# Altium PCB h743PCB.PcbDoc (part 1 of 3)
Units mil, origin at the board's own origin, x right, y up, seen from the top; angles counter-clockwise.
Board outline 2560 x 1770 mil, 4 copper layers (Top Layer, Signal, some, Bottom Layer), stack 63.712 mil thick; 101 components, 163 nets, 684 pads, 394 vias.
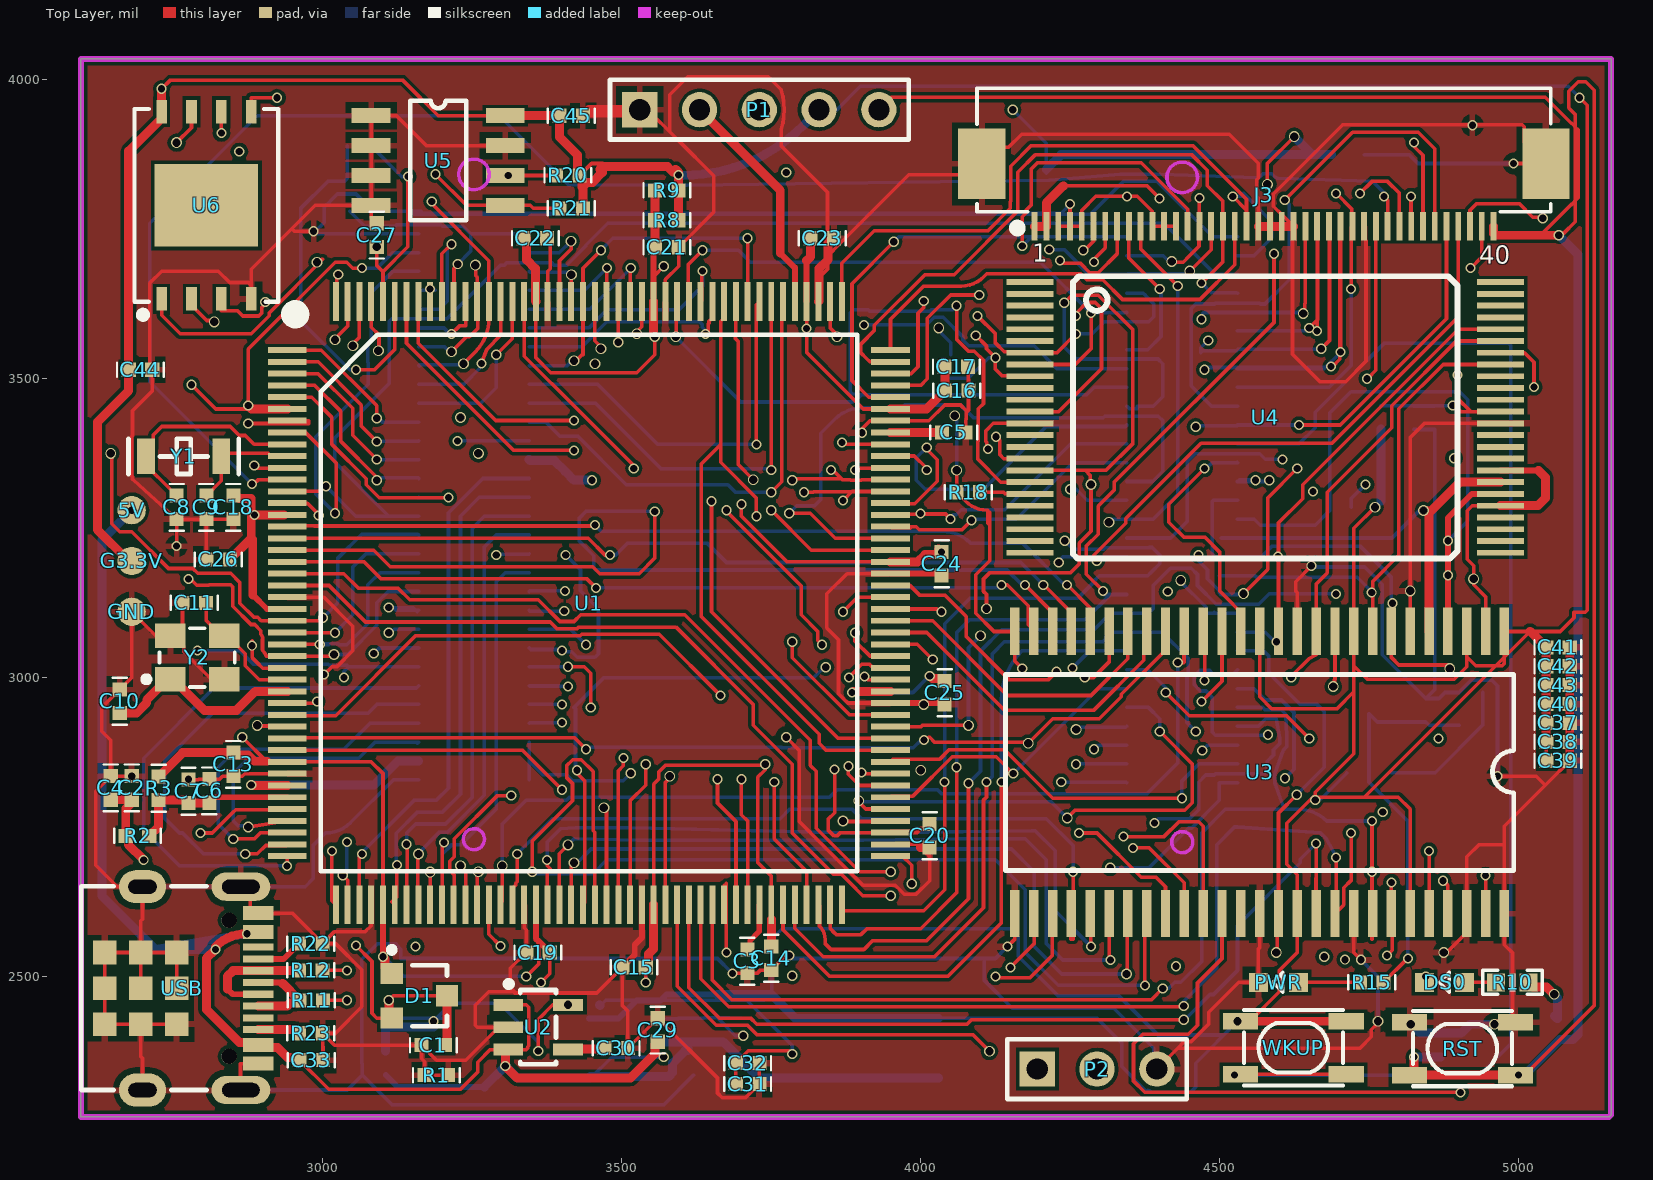
[diagram p0: Top Layer view]
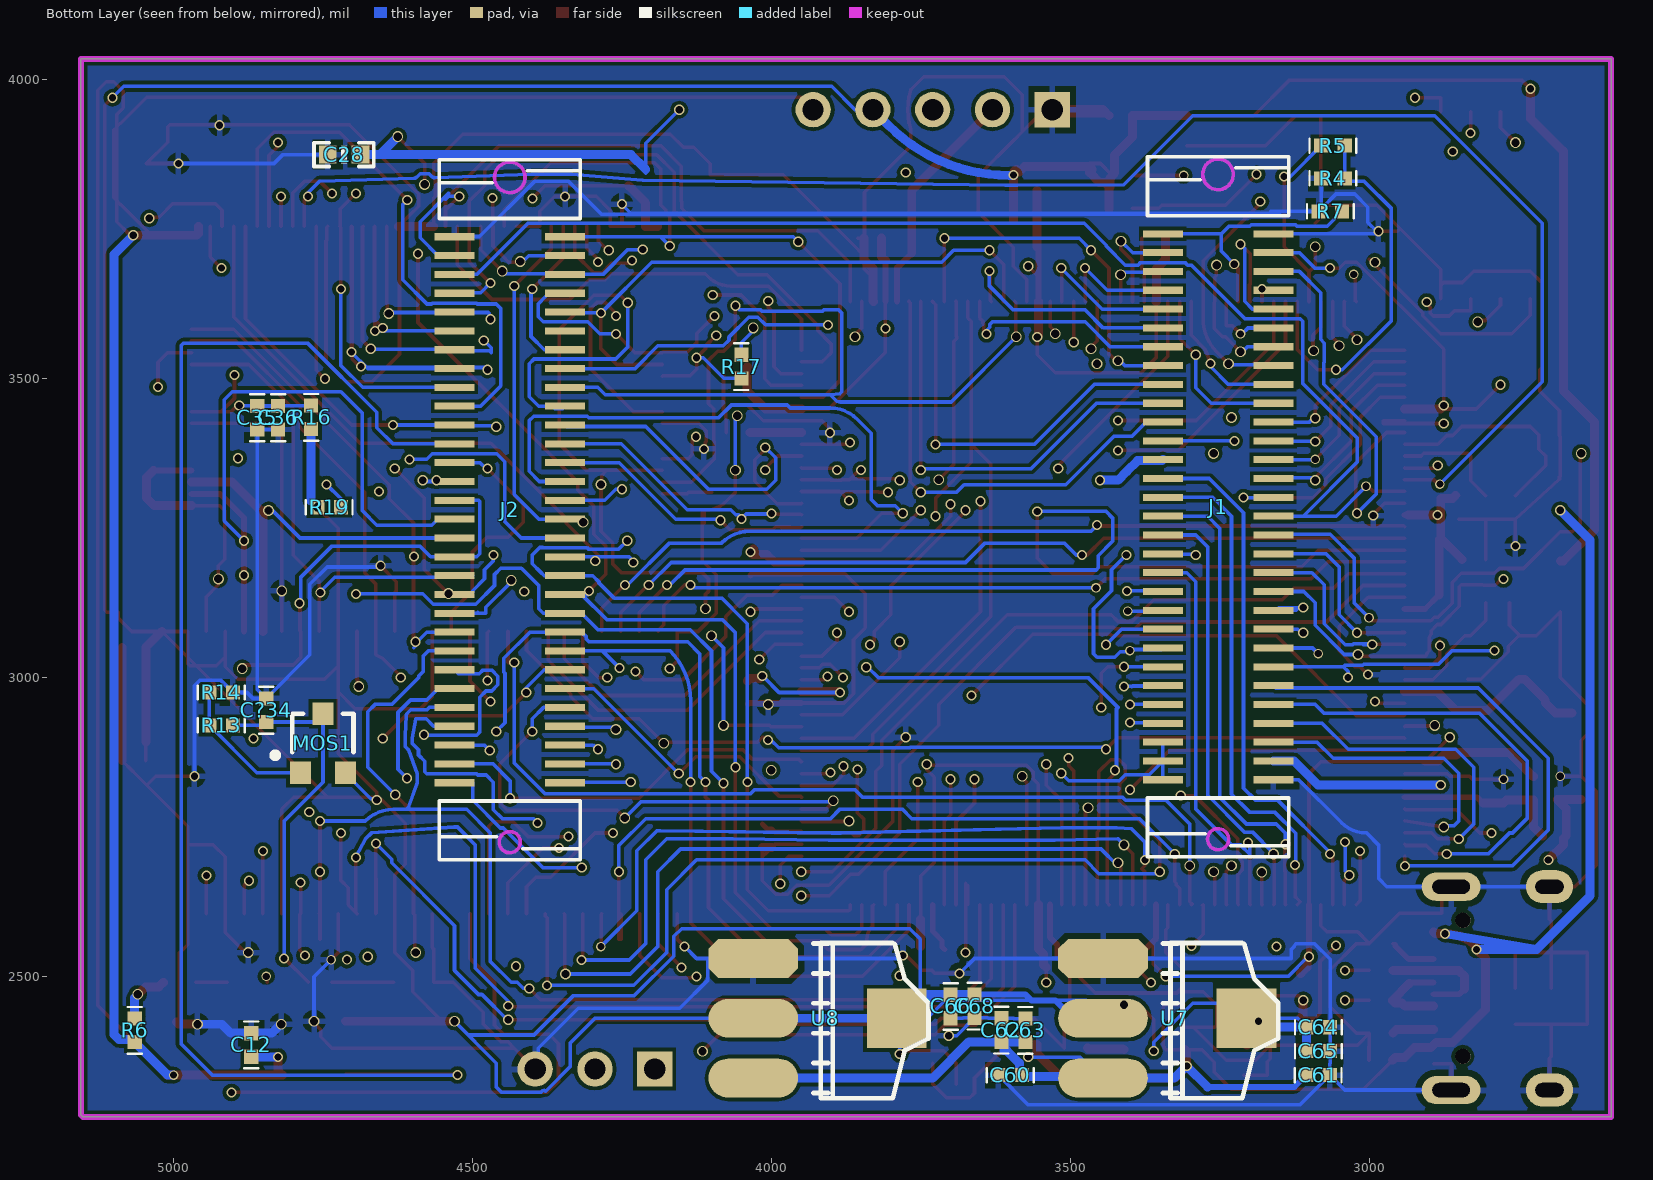
[diagram p1: Bottom Layer view, seen from below]
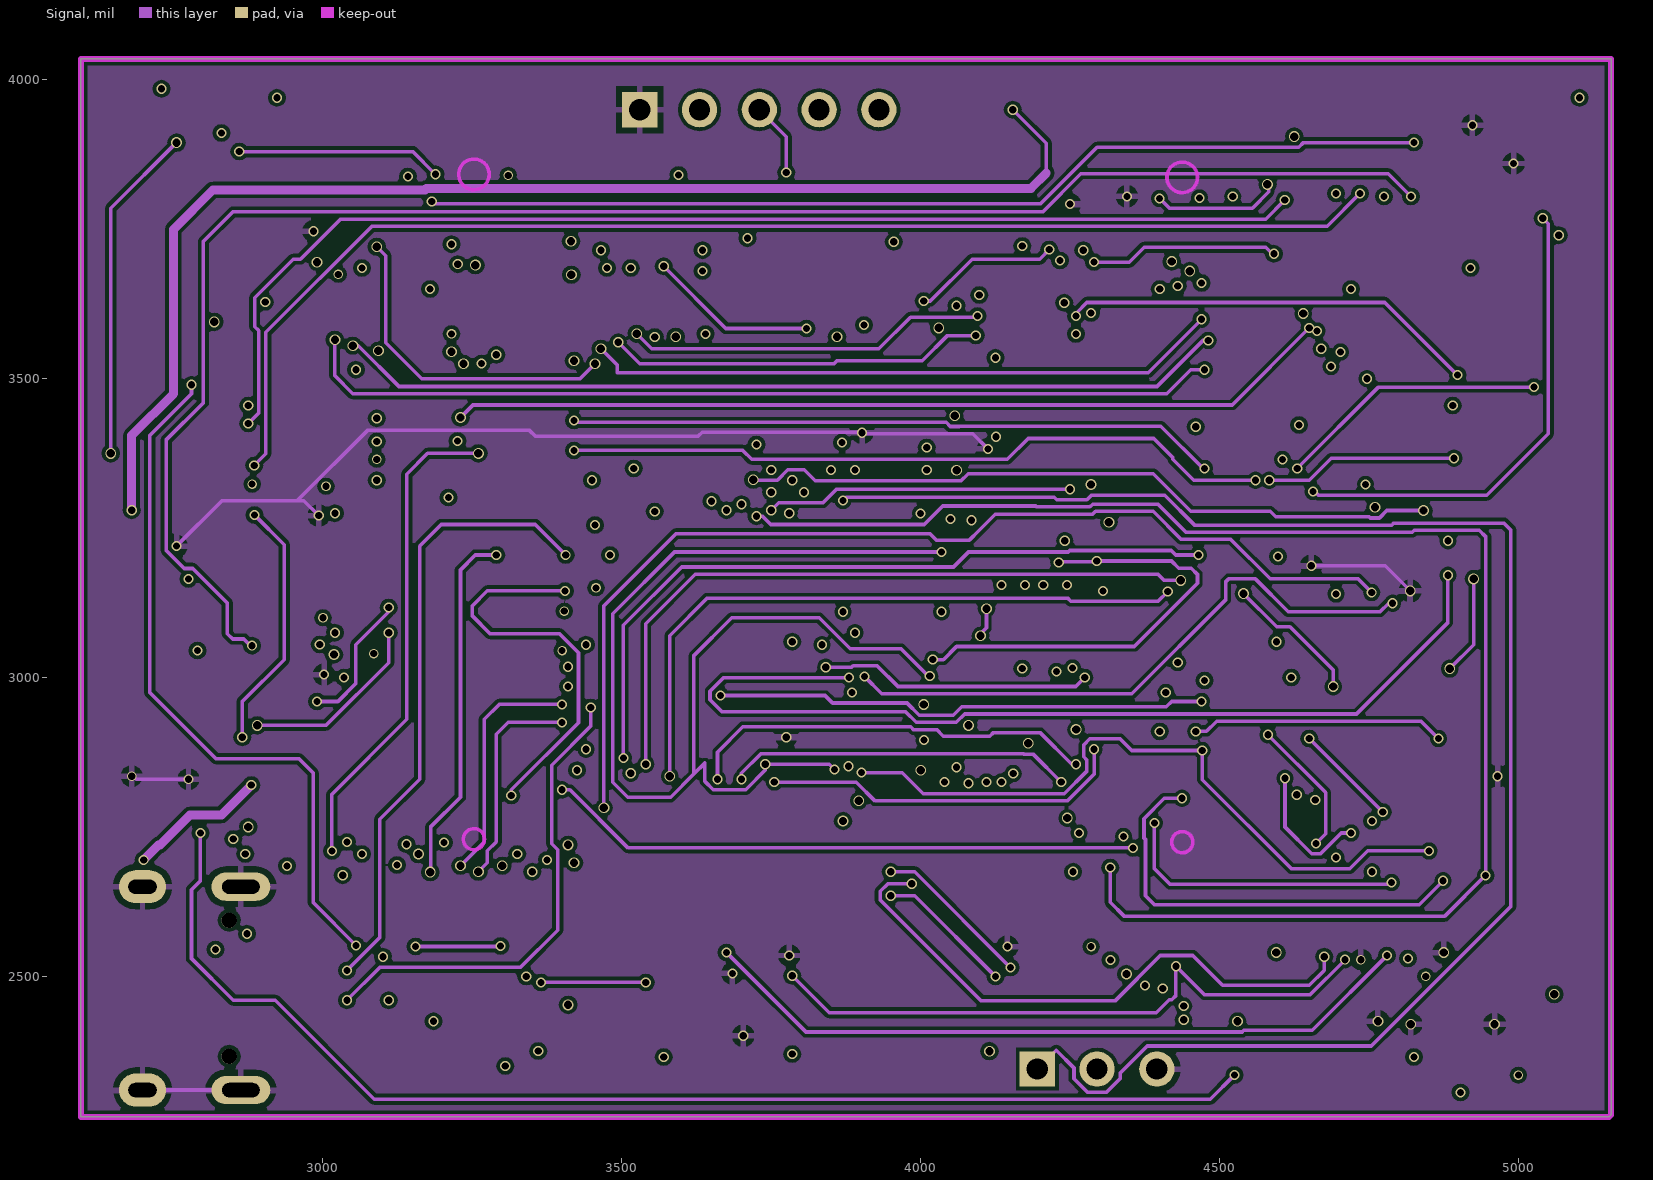
[diagram p2: Signal]
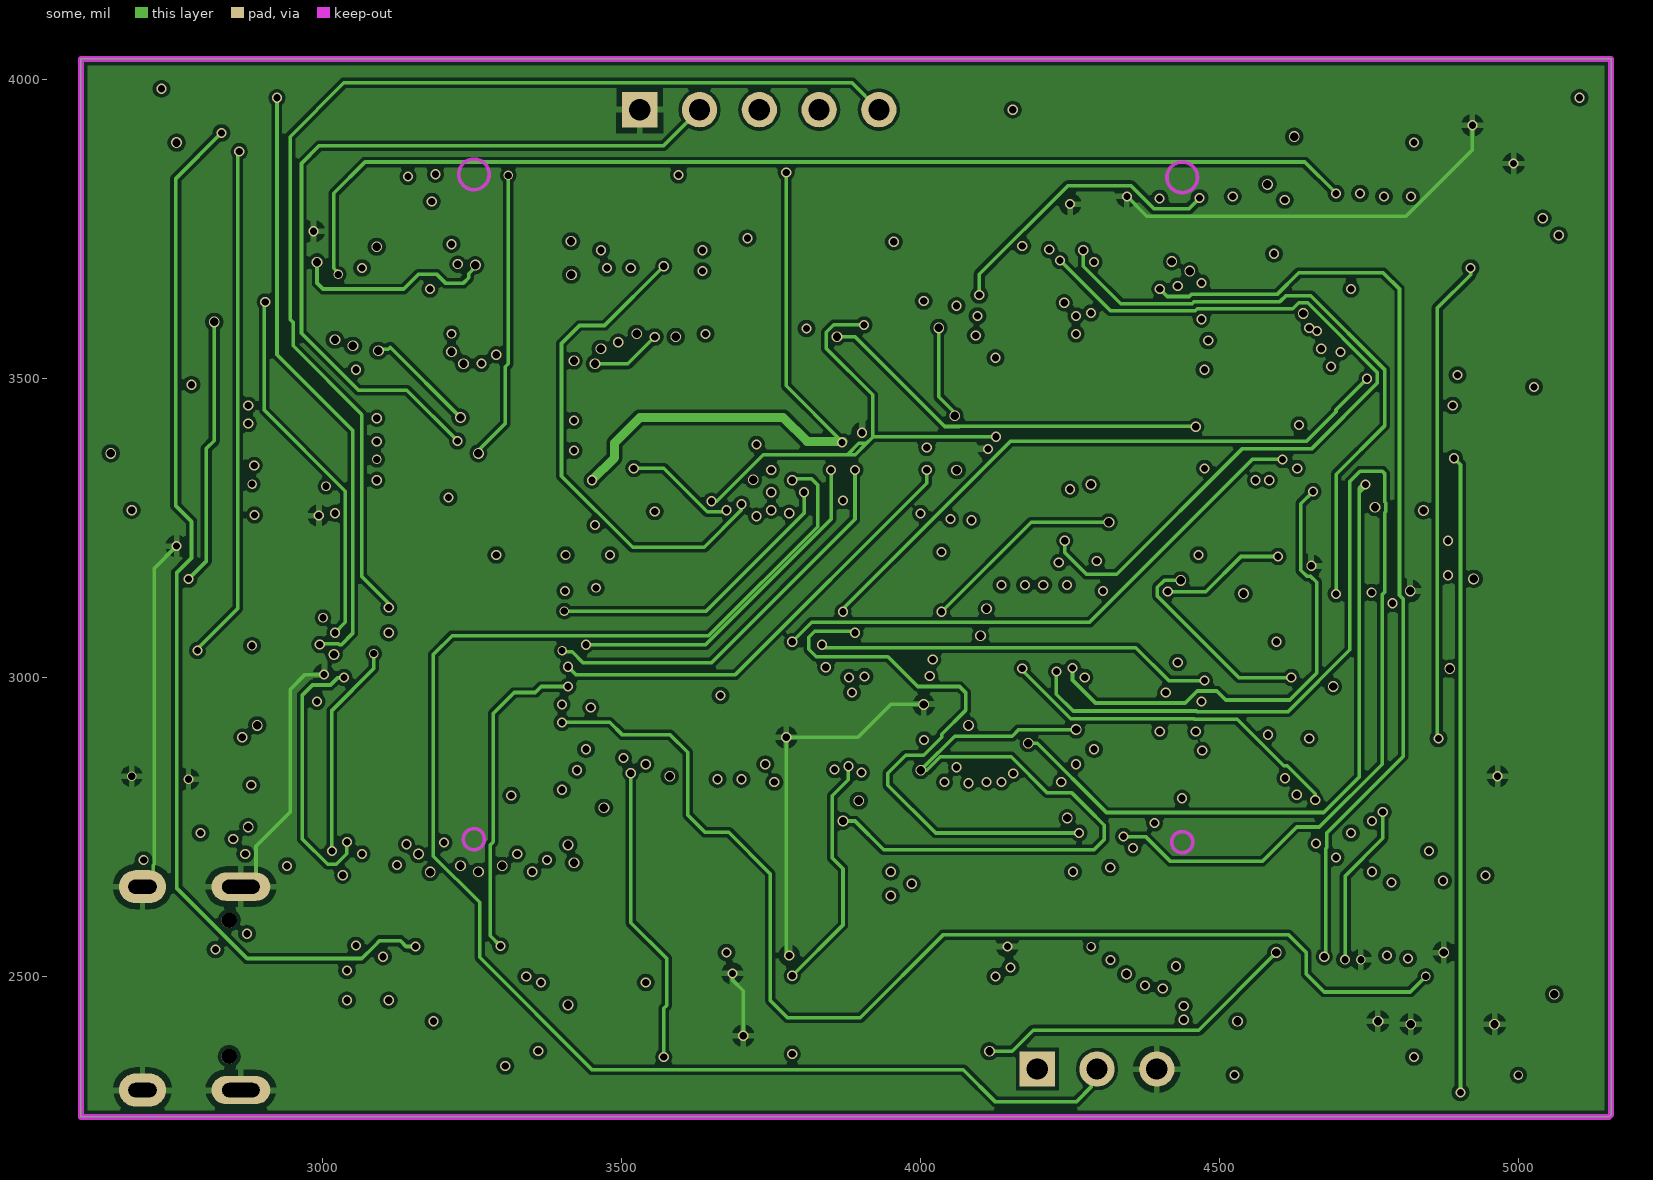
[diagram p3: some]

## Layer stack, top to bottom
Top Solder: solder mask 0.4, Solder Resist, Dk 3.5
Top Layer: signal copper 1.378
Dielectric 3: prepreg 2.8, PP-006, Dk 4.1
Signal: signal copper 1.378
Dielectric 1: core 49.8, Core-016, Dk 4.3
Dielectric 6: prepreg 2.8, PP-006, Dk 4.1
some: signal copper 1.378
Dielectric 2: prepreg 2.8, PP-006, Dk 4.1
Bottom Layer: signal copper 1.378
Bottom Solder: solder mask 0.4, Solder Resist, Dk 3.5

## Board outline
2595,2265 2595,4035 5155,4035 5155,2268.55 5151.45,2265

## Design rules (kind name [scope] priority, off if disabled: settings)
Clearance [All] p1: gap=6 ignorepadtopadclearanceinfootprint=FALSE except(0: Arc-Hole Track-Hole SMDPad-Hole THPad-Hole Via-Hole Fill-Hole Poly-Hole Region-Hole Text-Hole)
ComponentClearance [All] p1: gap=0 collisioncheckmode=3 verticalgap=0 showdistances=FALSE
DiffPairsRouting [All] p1: maxlimit=18 minlimit=10 mostfreqgap=10 toplayer_minwidth=6 toplayer_maxwidth=15 toplayer_prefwidth=6.5 midlayer1_maxgap=10 midlayer1_minwidth=15 midlayer1_maxwidth=15 midlayer1_prefwidth=15 midlayer2_maxgap=10 midlayer2_minwidth=15 midlayer2_maxwidth=15 midlayer2_prefwidth=15 bottomlayer_minwidth=6 bottomlayer_maxwidth=15 bottomlayer_prefwidth=6.5 maxuncoupledlength=500
HoleToHoleClearance [All] p1: gap=1 allowstackedmicrovias=TRUE
MinimumSolderMaskSliver [All] p1: minsoldermaskwidth=0
PlaneClearance [All] p1: clearance=6
PolygonConnect [All] p1: connectstyle=Relief reliefconductorwidth=10 reliefentries=4 polygonreliefangle="90 Angle" airgapwidth=10
RoutingVias [All] p1: holewidth=12 width=17 viastyle="Through Hole" minholewidth=12 minwidth=17 maxholewidth=14 maxwidth=18
SilkToSilkClearance [All] p1: silktosilkclearance=0
SilkToSolderMaskClearance [IsPad] p1: minsilkscreentomaskgap=0 clearancetoexposedcopper=TRUE
SolderMaskExpansion [All] p1: expansion=4 istentingtop=FALSE
Width [All] p1: maxlimit=20 minlimit=6 preferedwidth=6
23 further rules are at their usual default settings.

## Classes and differential pairs
net class "New Class": RESET VBAT VCAP1 VCAP2 VCC VCC3.3 VCC3.3M VCC5 VCC_LED VDDA VREF+
component class stm32h743: C1 C2 C3 C4 C5 C6 C7 C8 C9 C10 C11 C12 C13 C14 C15 C16 C17 C18 C19 C20 C21 C22 C23 C24 C25 C26 C27 D1 P1 R1 R2 R3 R4 R5 R6 R7 R8 R9 RST Y1 Y2
component class some: 5V C28 C29 C30 C31 C32 C33 C?34 DS0 G3.3V GND J3 MOS1 P2 PWR R10 R11 R12 R13 R14 R15 R22 R23 U2 USB WKUP
component class room: C35 C36 C37 C38 C39 C40 C41 C42 C43 C44 C45 R16 R17 R18 R19 R20 R21 U3 U5 U6
component class connect: J1 J2

## Components (designator, comment, footprint, x,y, rotation, side; value= is the part's Value field where it differs from the comment)
5V "TEST-POINT" TP-1.5 2680,3280 r90 top
C1 "0.1uF" 0402 3165,2385 r0 top
C2 "0.1uF" 0402 2680,2835 r270 top
C3 "22uF" 0402 3710,2505.63 r90 top
C4 "22uF" 0402 2645,2835 r270 top
C5 "22uF" 0402 4035.63,3410 r0 top
C6 "10uF" 0402 2810,2790.63 r90 top
C7 "0.1uF" 0402 2775,2790 r90 top
C8 "6pF" 0402 2755,3265 r90 top
C9 "6pF" 0402 2805,3265 r90 top
C10 "22pF" 0402 2660,2980 r270 top
C11 "22pF" 0402 2765,3125 r0 top
C12 "0.1uF" 0402 4870,2365.63 r90 bottom
C13 "0.1uF" 0402 2850,2874.37 r270 top
C14 "0.1uF" 0402 3750,2550 r270 top
C15 "0.1uF" 0402 3540,2515 r180 top
C16 "0.1uF" 0402 4040.63,3480 r0 top
C17 "0.1uF" 0402 4040,3520 r0 top
C18 "0.1uF" 0402 2850,3304.37 r270 top
C19 "0.1uF" 0402 3379.37,2540 r180 top
C20 "0.1uF" 0402 4015,2755 r270 top
C21 "0.1uF" 0402 3555.63,3720 r0 top
C22 "0.1uF" 0402 3335.63,3735 r0 top
C23 "0.1uF" 0402 3815.63,3735 r0 top
C24 "0.1uF" 0402 4035,3210 r270 top
C25 "0.1uF" 0402 4040,2994.37 r270 top
C26 "0.1uF" 0402 2844.32,3197.52 r180 top
C27 "0.1uF" 0402 3090,3720.63 r90 top
C28 "0.1uF" 0603P 4715,3875 r180 bottom
C29 "10uF" 0402 3560,2430 r270 top
C30 "10pF" 0402 3510,2380 r180 top
C31 "6pF" 0402 3730,2320 r180 top
C32 "10uF" 0402 3730,2355 r180 top
C33 "0.1uF" 0402 3000,2360 r180 top
C35 "0.1uF" 0402 4860,3415 r90 bottom
C36 "0.1uF" 0402 4825,3415 r90 bottom
C37 "0.1uF" 0402 5085.83,2924.05 r180 top
C38 "0.1uF" 0402 5085.83,2892.43 r180 top
C39 "0.1uF" 0402 5085.83,2860.81 r180 top
C40 "0.1uF" 0402 5085.83,2955.68 r180 top
C41 "0.1uF" 0402 5085.83,3050.54 r180 top
C42 "0.1uF" 0402 5085.83,3018.92 r180 top
C43 "0.1uF" 0402 5085.83,2987.3 r180 top
C44 "0.1uF" 0402 2675,3515 r0 top
C45 "0.1uF" 0402 3395.63,3940 r0 top
C60 "0.1uF" 0402 3580.63,2335 r0 bottom
C61 "10uF" 0402 3105,2335 r180 bottom
C62 "0.1uF" 0402 3615,2390.63 r90 bottom
C63 "10uF" 0402 3575,2390 r90 bottom
C64 "0.1uF" 0402 3104.37,2415 r180 bottom
C65 "10uF" 0402 3104.37,2375 r180 bottom
C66 "01uF" 0402 3700,2469.37 r270 bottom
C68 "10uF" 0402 3660,2470 r270 bottom
C?34 "0.1uF" 0402 4845,2925.63 r90 bottom
D1 "BAT54C" SOT-23 3156.26,2467.6 r270 top
DS0 "LED" SMDLED-0603 4910,2490 r180 top
G3.3V "TEST-POINT" TP-1.5 2680,3195 r180 top
GND "TEST-POINT" TP-1.5 2680,3110 r180 top
J1 "3710M060046G3FT01" 3710F060046G3FT01 3345.04,2829.02 r0 bottom
J2 "3710M060046G3FT01" 3710F060046G3FT01 4530.04,2824.06 r0 bottom
J3 "FPC-40" FPC-TOP40 4190.67,3751 r0 top
MOS1 "SI2301" SO-G3/C2.5 4750,2890 r180 bottom
P1 "SWD" HDR1X5 3530,3950 r0 top
P2 "USART1" HDR1X3 4195,2345 r0 top
PWR "LED" SMDLED-0603 4631.93,2490 r180 top
R1 "10K" 0402 3170,2335 r0 top
R2 "10R" 0402 2709.37,2735 r180 top
R3 "10R" 0402 2725,2834.37 r270 top
R4 "0R" 0402 3040.63,3835 r0 bottom
R5 "0R" 0402 3080,3890 r180 bottom
R6 "10K" 0402 5065,2390 r90 bottom
R7 "100K" 0402 3045,3780 r0 bottom
R8 "0R" 0402 3595,3765 r180 top
R9 "0R" 0402 3595,3815 r180 top
R10 "1K" 0603P 4990,2490 r180 top
R11 "22R" 0402 3000,2460 r180 top
R12 "22R" 0402 2999.37,2510 r180 top
R13 "1K" 0402 4900.63,2920 r0 bottom
R14 "100K" 0402 4900.63,2975 r0 bottom
R15 "1K" 0402 4735,2490 r0 top
R16 "0R" 0402 4770,3455 r270 bottom
R17 "10K" 0402 4050,3540 r270 bottom
R18 "10K" 0402 4099.37,3310 r180 top
R19 "10K" 0402 4759.37,3285 r180 bottom
R20 "4.7K" 0402 3390,3840 r0 top
R21 "4.7K" 0402 3395.63,3785 r0 top
R22 "4.7K" 0402 2999.37,2555 r180 top
R23 "4.7K" 0402 2999.37,2405 r180 top
RST "KEY_M" KEY_SOP324225 4989.09,2442.28 r180 top
U1 "STM32H743IIT6" LQFP176 2940.3,3547.78 r0 top
U2 "CAT6219-330TD" SOT-23-5 3310,2452.4 r0 top
U3 "IS42S16160B" TSOP54 4976.5,3077.44 r270 top
U4 "K9F2G08U0C" TSOP48 4182.6,3661.53 r0 top
U5 "24C256" SOP-8 3080.59,3940 r0 top
U6 "W25Q128" WSON8 2805,3790 r90 top
U7 "AMS1117-3.3" AMS1117 3444.94,2530.03 r270 bottom
U8 "AMS1117-3.3" AMS1117 4029.94,2530.03 r270 bottom
USB "USB OTG" "USB Type-C" 2795,2480 r270 top
WKUP "KEY_UP" KEY_SOP324225 4706.26,2443.7 r180 top
Y1 "32.768KHz" XTAL3215 2704.02,3370 r0 top
Y2 "25Mhz" XTAL3225 2744.45,2997.17 r0 top

## Footprints (in the part's own frame and the unit in brackets; to place one, negate y for a bottom-side part, rotate by r counter-clockwise, add the part's x,y. Pads: shape width x height; smd on the part's side, far side on the other; paste and mask are expansions set on the pad)
0402 [mm]
  rect 0.6x0.6 smd: 1(0,0) 2(1,0)
  silkscreen extent -0.5,-0.3 1.5,0.3
0603P [mil]
  rect 30x30 smd: 1(-27,0) 2(27.5,-0.06)
  silkscreen extent -50,-20 50,20
3710F060046G3FT01 [mm]
  rect 1.7x0.3 smd: 1(-4.7,0) 2(-4.7,-0.8) 3(-4.7,-1.6) 4(-4.7,-2.4) 5(-4.7,-3.2) 6(-4.7,-4) 7(-4.7,-4.8) 8(-4.7,-5.6) 9(-4.7,-6.4) 10(-4.7,-7.2) 11(-4.7,-8) 12(-4.7,-8.8) 13(-4.7,-9.6) 14(-4.7,-10.4) 15(-4.7,-11.2) 16(-4.7,-12) 17(-4.7,-12.8) 18(-4.7,-13.6) 19(-4.7,-14.4) 20(-4.7,-15.2) 21(-4.7,-16) 22(-4.7,-16.8) 23(-4.7,-17.6) 24(-4.7,-18.4) 25(-4.7,-19.2) 26(-4.7,-20) 27(-4.7,-20.8) 28(-4.7,-21.6) 29(-4.7,-22.4) 30(-4.7,-23.2) 31(0,-23.2) 32(0,-22.4) 33(0,-21.6) 34(0,-20.8) 35(0,-20) 36(0,-19.2) 37(0,-18.4) 38(0,-17.6) 39(0,-16.8) 40(0,-16) 41(0,-15.2) 42(0,-14.4) 43(0,-13.6) 44(0,-12.8) 45(0,-12) 46(0,-11.2) 47(0,-10.4) 48(0,-9.6) 49(0,-8.8) 50(0,-8) 51(0,-7.2) 52(0,-6.4) 53(0,-5.6) 54(0,-4.8) 55(0,-4) 56(0,-3.2) 57(0,-2.4) 58(0,-1.6) 59(0,-0.8) 60(0,0)
  Keep-Out Layer circle w0.152: c-2.35,2.525 r0.45
  Keep-Out Layer circle w0.152: c-2.35,-25.725 r0.65
  silkscreen extent -5.35,-26.47 0.65,3.28
AMS1117 [mil]
  oct 65x150 smd: 1(0.03,-0.06)
  oval 65x150 smd: 2(100.03,-0.06) 3(200.03,-0.06)
  rect 100x100 smd: 4(100.03,239.94)
  silkscreen extent -26,100 234,293
FPC-TOP40 [mm]
  rect 0.25x1.2 smd: 1(0,0.102) 2(0.5,0.102) 3(1,0.102) 4(1.5,0.102) 5(2,0.102) 6(2.5,0.102) 7(3,0.102) 8(3.5,0.102) 9(4,0.102) 10(4.5,0.102) 11(5,0.102) 12(5.5,0.102) 13(6,0.102) 14(6.5,0.102) 15(7,0.102) 16(7.5,0.102) 17(8,0.102) 18(8.5,0.102) 19(9,0.102) 20(9.5,0.102) 21(10,0.102) 22(10.5,0.102) 23(11,0.102) 24(11.5,0.102) 25(12,0.102) 26(12.5,0.102) 27(13,0.102) 28(13.5,0.102) 29(14,0.102) 30(14.5,0.102) 31(15,0.102) 32(15.5,0.102) 33(16,0.102) 34(16.5,0.102) 35(17,0.102) 36(17.5,0.102) 37(18,0.102) 38(18.5,0.102) 39(19,0.102) 40(19.5,0.102)
  rect 2x3 smd: A(-2.25,2.754) B(21.725,2.754)
  silkscreen extent -2.45,-0.15 21.92,5.97
HDR1X3 [mm]
  rect 1.5x1.5 hole 0.9: 1(0,0)
  round 1.5 hole 0.9: 2(2.54,0) 3(5.08,0)
  silkscreen extent -1.27,-1.27 6.35,1.27
HDR1X5 [mm]
  rect 1.5x1.5 hole 0.9: 1(0,0)
  round 1.5 hole 0.9: 2(2.54,0) 3(5.08,0) 4(7.62,0) 5(10.16,0)
  silkscreen extent -1.27,-1.27 11.43,1.27
KEY_SOP324225 [mm]
  rect 1.5x0.7 smd: 1(-0.15,2.725) 1(4.35,2.725) 2(-0.15,0.475) 2(4.35,0.475)
  silkscreen extent 0,0 4.2,3.2
LQFP176 [mm]
  rect 1.65x0.254 smd: 1(0,0) 2(0,-0.5) 3(0,-1) 4(0,-1.5) 5(0,-2) 6(0,-2.5) 7(0,-3) 8(0,-3.5) 9(0,-4) 10(0,-4.5) 11(0,-5) 12(0,-5.5) 13(0,-6) 14(0,-6.5) 15(0,-7) 16(0,-7.5) 17(0,-8) 18(0,-8.5) 19(0,-9) 20(0,-9.5) 21(0,-10) 22(0,-10.5) 23(0,-11) 24(0,-11.5) 25(0,-12) 26(0,-12.5) 27(0,-13) 28(0,-13.5) 29(0,-14) 30(0,-14.5) 31(0,-15) 32(0,-15.5) 33(0,-16) 34(0,-16.5) 35(0,-17) 36(0,-17.5) 37(0,-18) 38(0,-18.5) 39(0,-19) 40(0,-19.5) 41(0,-20) 42(0,-20.5) 43(0,-21) 44(0,-21.5) 89(25.631,-21.5) 90(25.631,-21) 91(25.631,-20.5) 92(25.631,-20) 93(25.631,-19.5) 94(25.631,-19) 95(25.631,-18.5) 96(25.631,-18) 97(25.631,-17.5) 98(25.631,-17) 99(25.631,-16.5) 100(25.631,-16) 101(25.631,-15.5) 102(25.631,-15) 103(25.631,-14.5) 104(25.631,-14) 105(25.631,-13.5) 106(25.631,-13) 107(25.631,-12.5) 108(25.631,-12) 109(25.631,-11.5) 110(25.631,-11) 111(25.631,-10.5) 112(25.631,-10) 113(25.631,-9.5) 114(25.631,-9) 115(25.631,-8.5) 116(25.631,-8) 117(25.631,-7.5) 118(25.631,-7) 119(25.631,-6.5) 120(25.631,-6) 121(25.631,-5.5) 122(25.631,-5) 123(25.631,-4.5) 124(25.631,-4) 125(25.631,-3.5) 126(25.631,-3) 127(25.631,-2.5) 128(25.631,-2) 129(25.631,-1.5) 130(25.631,-1) 131(25.631,-0.5) 132(25.631,0)
  rect 0.254x1.65 smd: 45(2.065,-23.566) 46(2.566,-23.566) 47(3.066,-23.566) 48(3.565,-23.566) 49(4.066,-23.566) 50(4.565,-23.566) 51(5.066,-23.566) 52(5.565,-23.566) 53(6.066,-23.566) 54(6.565,-23.566) 55(7.066,-23.566) 56(7.565,-23.566) 57(8.066,-23.566) 58(8.565,-23.566) 59(9.066,-23.566) 60(9.565,-23.566) 61(10.066,-23.566) 62(10.565,-23.566) 63(11.066,-23.566) 64(11.565,-23.566) 65(12.066,-23.566) 66(12.565,-23.566) 67(13.066,-23.566) 68(13.565,-23.566) 69(14.066,-23.566) 70(14.565,-23.566) 71(15.066,-23.566) 72(15.566,-23.566) 73(16.066,-23.566) 74(16.566,-23.566) 75(17.065,-23.566) 76(17.566,-23.566) 77(18.065,-23.566) 78(18.566,-23.566) 79(19.065,-23.566) 80(19.566,-23.566) 81(20.065,-23.566) 82(20.566,-23.566) 83(21.065,-23.566) 84(21.566,-23.566) 85(22.065,-23.566) 86(22.566,-23.566) 87(23.065,-23.566) 88(23.566,-23.566) 133(23.566,2.065) 134(23.065,2.065) 135(22.566,2.065) 136(22.065,2.065) 137(21.566,2.065) 138(21.065,2.065) 139(20.566,2.065) 140(20.065,2.065) 141(19.566,2.065) 142(19.065,2.065) 143(18.566,2.065) 144(18.065,2.065) 145(17.566,2.065) 146(17.065,2.065) 147(16.566,2.065) 148(16.066,2.065) 149(15.566,2.065) 150(15.066,2.065) 151(14.565,2.065) 152(14.066,2.065) 153(13.565,2.065) 154(13.066,2.065) 155(12.565,2.065) 156(12.066,2.065) 157(11.565,2.065) 158(11.066,2.065) 159(10.565,2.065) 160(10.066,2.065) 161(9.565,2.065) 162(9.066,2.065) 163(8.565,2.065) 164(8.066,2.065) 165(7.565,2.065) 166(7.066,2.065) 167(6.565,2.065) 168(6.066,2.065) 169(5.565,2.065) 170(5.066,2.065) 171(4.565,2.065) 172(4.066,2.065) 173(3.565,2.065) 174(3.066,2.065) 175(2.566,2.065) 176(2.065,2.065)
  silkscreen extent 0.04,-22.15 24.22,1.82
SMDLED-0603 [mil]
  rect 32x32 smd: 1(0,0) 2(66.93,0)
  silkscreen extent 26,-17 42,17
SO-G3/C2.5 [mm]
  rect 0.9x0.95 smd: 1(-0.95,-1.25) 2(0.95,-1.25) 3(0,1.25)
  silkscreen extent -2.16,-0.63 1.3,1.25
SOP-8 [mil]
  rect 65x25 smd: 1(0,0) 2(0,-50) 3(0,-100) 4(0,-150) 5(224.41,-150) 6(224.41,-100) 7(224.41,-50) 8(224.41,0)
  silkscreen extent 65,-175 159,25
SOT-23 [mm]
  rect 0.9x0.95 smd: 1(-0.95,-1.048) 2(0.95,-1.048) 3(0,1.302)
  silkscreen extent -2.07,-1.17 1.3,1.3
SOT-23-5 [mil]
  rect 50x20 smd: 1(0,0) 2(0,-37.4) 3(0,-74.8) 4(100,-74.8) 5(100,0)
  silkscreen extent 0,-99 80,35
TP-1.5 [mm]
  round 1.2 smd: 1(0,0)
TSOP48 [mm]
  rect 2x0.25 smd: 1(0,0) 2(0,-0.5) 3(0,-1) 4(0,-1.5) 5(0,-2) 6(0,-2.5) 7(0,-3) 8(0,-3.5) 9(0,-4) 10(0,-4.5) 11(0,-5) 12(0,-5.5) 13(0,-6) 14(0,-6.5) 15(0,-7) 16(0,-7.5) 17(0,-8) 18(0,-8.5) 19(0,-9) 20(0,-9.5) 21(0,-10) 22(0,-10.5) 23(0,-11) 24(0,-11.5) 25(20,-11.5) 26(20,-11) 27(20,-10.5) 28(20,-10) 29(20,-9.5) 30(20,-9) 31(20,-8.5) 32(20,-8) 33(20,-7.5) 34(20,-7) 35(20,-6.5) 36(20,-6) 37(20,-5.5) 38(20,-5) 39(20,-4.5) 40(20,-4) 41(20,-3.5) 42(20,-3) 43(20,-2.5) 44(20,-2) 45(20,-1.5) 46(20,-1) 47(20,-0.5) 48(20,0)
  silkscreen extent 1.83,-11.75 18.17,0.25
TSOP54 [mm]
  rect 2x0.4 smd: 1(0,0) 2(0,-0.8) 3(0,-1.6) 4(0,-2.4) 5(0,-3.2) 6(0,-4) 7(0,-4.8) 8(0,-5.6) 9(0,-6.4) 10(0,-7.2) 11(0,-8) 12(0,-8.8) 13(0,-9.6) 14(0,-10.4) 15(0,-11.2) 16(0,-12) 17(0,-12.8) 18(0,-13.6) 19(0,-14.4) 20(0,-15.2) 21(0,-16) 22(0,-16.8) 23(0,-17.6) 24(0,-18.4) 25(0,-19.2) 26(0,-20) 27(0,-20.8) 28(12,-20.8) 29(12,-20) 30(12,-19.2) 31(12,-18.4) 32(12,-17.6) 33(12,-16.8) 34(12,-16) 35(12,-15.2) 36(12,-14.4) 37(12,-13.6) 38(12,-12.8) 39(12,-12) 40(12,-11.2) 41(12,-10.4) 42(12,-9.6) 43(12,-8.8) 44(12,-8) 45(12,-7.2) 46(12,-6.4) 47(12,-5.6) 48(12,-4.8) 49(12,-4) 50(12,-3.2) 51(12,-2.4) 52(12,-1.6) 53(12,-0.8) 54(12,0)
  silkscreen extent 1.83,-21.2 10.16,0.4
"USB Type-C" [mm]
  rect 0.6x1.3 smd mask+0.064: 1(-3.2,2.462) 2(-2.4,2.462) 11(2.4,2.462) 12(3.2,2.462)
  rect 0.3x1.3 smd mask+0.064: 3(-1.75,2.462) 4(-1.25,2.462) 5(-0.75,2.462) 6(-0.25,2.462) 7(0.25,2.462) 8(0.75,2.462) 9(1.25,2.462) 10(1.75,2.462)
  oval 1.2x2.5 hole 0.6 slot 1.6 at 90 deg: SH1(-4.32,1.717) SH3(4.32,1.717)
  oval 1.4x2 hole 0.6 slot 1.2 at 90 deg: SH2(-4.32,-2.462) SH4(4.32,-2.462)
  rect 1x1 smd mask+0: SH2(-1.524,-1.016) SH2(-1.524,-2.54) SH2(-1.524,-4.064) SH2(0,-1.016) SH2(0,-2.54) SH2(0,-4.064) SH2(1.524,-4.064)
  rect 1x1 smd paste+0 mask+0: SH2(1.524,-1.016) SH2(1.524,-2.54)
  round 0.65 hole 0.65 unplated mask+0: ""(-2.89,1.218) ""(2.89,1.218)
  silkscreen extent -4.34,-5.07 4.32,0.25, body extent -4.47,-5.04 4.47,2.86, height 3.2
WSON8 [mm]
  rect 1x0.45 smd: 1(-3.975,1.905) 2(-3.975,0.635) 3(-3.975,-0.635) 4(-3.975,-1.905) 5(3.975,-1.905) 6(3.975,-0.635) 7(3.975,0.635) 8(3.975,1.905)
  rect 3.5x4.4 smd: 9(0,0)
  silkscreen extent -4.8,-3.05 4.1,3.05
XTAL3215 [mm]
  rect 0.75x1.5 smd: 1(0,0) 2(3.2,0)
  silkscreen extent -0.74,-0.75 3.94,0.75
XTAL3225 [mm]
  rect 1.3x1.05 smd: 1(0,0) 2(2.3,0) 3(2.3,1.85) 4(0,1.85)
  silkscreen extent -1.14,-0.33 2.74,2.17

## Part data
5V G3.3V GND: "测试点"
C1 C2 C3 C4 C5 C6 C7 C10 C11 C12 C13 C14 C15 C16 C17 C18 C19 C20 C21 C22 C23 C24 C25 C26 C27 C28 C29 C30 C31 C32 C33 C35 C36 C37 C38 C39 C40 C41 C42 C43 C44 C45 C60 C61 C62 C63 C64 C65 C66 C68 C?34: library part C
C8 C9: library part C_7
D1: "双肖特基二极管"
J1 J2: library part 3710F, "3710F060046G3FT01"
J3: "FPC-40P-0.5mm"
MOS1: library part MOS-P, "IRLML6401/SI2301"
P1: library part "Header 5", "Header, 5-Pin", LatestRevisionDate=17-Jul-2002, LatestRevisionNote="Re-released for DXP Platform.", Publisher="Altium Limited"
P2: library part "Header 3", "Header, 3-Pin", LatestRevisionDate=17-Jul-2002, LatestRevisionNote="Re-released for DXP Platform.", Publisher="Altium Limited"
R1 R2 R3 R4 R5 R6 R7 R8 R9 R10 R11 R12 R13 R14 R15 R16 R17 R18 R19 R20 R21 R22 R23: library part R
U1: JLCPCB Part Class="Extended Part", Low-Voltage Detect=有, Manufacturer=ST(意法半导体), Operating Temperature Range=-40℃~+85℃, Operating Voltage Range=1.62V~3.6V, ADC (Bit)=16bit, Add into BOM=yes, CCP Capture/Compare=-, communication protocol=-, Convert to PCB=yes, CPU Core=ARM-M系列, CPU Maximum Speed=480MHz, DAC (Bit)=12bit, Datasheet=https://atta.szlcsc.com/upload/public/pdf/source/20180326/C129442_D4CD7A13251C79DE4F637D238512E0C6.pdf, Device=STM32H743IIT6, Direct Memory Access=有, GPIO Ports Number=140, Infrared Data Association=有, Internal Comparator=-, Internal Oscillator=有, LCD Module=有, LCSC Part Name=STM32H743IIT6, Manufacturer Part=STM32H743IIT6, Peripheral/Function=DMA；LCD/LED驱动；PWM, Program Memory Type=FLASH, Program Storage Size=2MB, PWM (Bit)=-, RAM Size=1MB, Real-Time Clock=-, Secure Digital Input and Output=有, Supplier=LCSC, Supplier Footprint=LQFP-176(24x24), Supplier Part=C89597, Symbol=STM32H743IIT6, Universal Serial Bus=有, Watchdog=有
U2: "3.3V 500mA LDO"
U3: "32MB SDRAM"
U4: "256MB NAND FLASH"
U5: "EEPROM"
U7 U8: library part AMS1117
USB: library part "USB Type-C", "12P TypeC 母座"
WKUP: library part KEY_M_1
Y1: library part XTAL, "普通晶振", LatestRevisionDate=17-Jul-2002, LatestRevisionNote="Re-released for DXP Platform.", Published=8-Jun-2000, Publisher="Altium Limited"
Y2: library part XTAL_3225, "3225贴片无源晶振"

## Via types
v1: diameter 17, hole 12, Top Layer to Bottom Layer, 305 vias
v2: diameter 18, hole 14, Top Layer to Bottom Layer, 72 vias
v3: diameter 17/16/16/16 (per signal layer), hole 12, Top Layer to Bottom Layer, 17 vias

## Nets (pads, with @x,y where several pads share a name; then routed paths per layer and width w, separated by ;. In a path a pad name is that pad's centre, name@x,y a point inside that pad or via, vN(x,y) a via of type N, cw(c..) or ccw(c..) an arc to the next point about the centre after c; other vN are vias at no path point)
BOOT0: J1.31 R7.1 U1.166 | length 442.6
  Top Layer w6: U1.166@3218.47,3629.09 3219.23,3629.86 3219.23,3684.23 3225.53,3690.53 v1(3225.53,3691.6)
  Bottom Layer w6: R7.1@3045,3780 3070,3755 3120.5,3755 3122.81,3757.31 3197.19,3757.31 3199.5,3755 3234.3,3755 3246.9,3742.4 ; v1(3225.53,3691.6) 3246.9,3712.97 3246.9,3742.4 ; J1.31@3345.04,3742.4 3246.9,3742.4
FMC_A0: U1.16 U3.23 | length 1438
  Top Layer w6: U1.16@2940.3,3252.5 2941.55,3253.75 2985.5,3253.75 2985.75,3253.5 3453.5,3253.5 v1(3455,3255) ; v1(4245,3155) 4283.58,3116.42 U3.23@4283.58,3077.44
  Bottom Layer w6: v1(3455,3255) 3465,3245 4035,3245 cw(c4035,3176.72) 4083.28,3225 4085.71,3225 4170.25,3225 4240.25,3155 v1(4245,3155)
FMC_A1: U1.17 U3.24 | length 1411.2
  Top Layer w6: U1.17@2940.3,3232.82 3443.94,3232.82 3471.75,3205 v1(3480,3205) ; v1(4205,3155.09) 4205.94,3155.09 4252.09,3108.94 U3.24@4252.09,3077.44
  Bottom Layer w6: v1(3480,3205) 3490,3205 3510,3225 3642.44,3225 3674.94,3192.5 4167.59,3192.5 v1(4205,3155.09)
FMC_A2: U1.18 U3.25 | length 1773.7
  Top Layer w6: U1.18@2940.3,3213.13 3085,3213.13 3112.63,3185.5 3451.25,3185.5 3462.86,3173.9 3528.9,3173.9 3555,3200 v1(3555,3278) ; v1(4174.73,3155) 4174.73,3154.79 4220.59,3108.94 U3.25@4220.59,3077.44
  Bottom Layer w6: v1(3555,3278) 3440,3278 3429,3267 3429,3228 3453.02,3203.98 3453.02,3183.73 3456.75,3180 4144.47,3180 4169.47,3155 v1(4174.73,3155)
FMC_A3: U1.19 U3.26 | length 1321.3
  Top Layer w6: U1.19@2940.3,3193.45 3069.23,3193.45 3097.68,3165 3398.07,3165 3441.75,3165 v3(3456.75,3150) ; v1(4135,3155) 4145,3155 4180,3120 4180,3088.35 4190,3078.35 U3.26@4189.09,3077.44
  Bottom Layer w6: v3(3456.75,3150) 4130,3150 v1(4135,3155)
FMC_A4: U1.20 U3.29 | length 1679.1
  Top Layer w6: U1.20@2940.3,3173.76 3035,3173.76 3059.38,3149.38 3125.62,3149.38 3145,3130 3360.25,3130 3396.51,3093.74 3420.05,3093.74 3431.31,3105 3605,3105 3815,2895 3815,2853 3825,2843 3825,2748.03 3898.03,2675 v1(3950,2675) ; v1(4150,2515) 4190,2555 4190,2604.09 U3.29@4189.09,2605
  Signal w6: v1(3950,2675) 3990,2675 v1(4150,2515)
FMC_A5: U1.21 U3.30 | length 1727.6
  Top Layer w6: U1.21@2940.3,3154.08 3010,3154.08 3071.08,3093 3380.28,3093 3391.54,3081.74 3425.02,3081.74 3427.78,3084.5 3590.5,3084.5 3720,2955 3720,2920 3785,2855 3785,2740 3854.09,2670.91 3867.37,2670.91 3876.8,2661.48 3878.47,2659.81 3882.07,2656.21 3903.28,2635 v1(3950,2635) ; v1(4125,2500) 4127.5,2497.5 4182.5,2497.5 4220,2535 4220,2604.41 U3.30@4220.59,2605
  Signal w6: v1(3950,2635) 3990,2635 v1(4125,2500)
FMC_A6: U1.60 U3.31 | length 1278
  Top Layer w6: U1.60@3316.89,2620 3316.89,2647.48 3318.89,2649.48 3319.06,2649.48 3322.58,2653 3322.58,2656.21 3325,2658.63 v1(3325,2705) ; U3.31@4252.09,2605 4251.04,2603.96 4251.04,2562.63 4255,2562.63 v1(4255,2675)
  Bottom Layer w6: v1(3325,2705) 3384,2764 3765.07,2764 3781.07,2780 3885,2780 3901,2764 4210.14,2764 4255,2719.14 v1(4255,2675)
FMC_A7: U1.63 U3.32 | length 1223.1
  Top Layer w6: v1(3375,2695) 3375,2685.37 3380,2680.37 3375.47,2675.84 3375.47,2620.47 U1.63@3375.95,2620 ; U3.32@4283.58,2605 4284.29,2604.29 4284.29,2550.71 v3(4285,2550)
  Bottom Layer w6: v1(3375,2695) 3375,2725 3397.23,2747.23 3422.02,2748.99 3515.1,2748.99 3884.02,2740 3898.93,2740 4186.03,2744 4191,2744 4225,2710 4225,2610 v3(4285,2550)
FMC_A8: U1.64 U3.33 | length 1262.7
  Top Layer w6: U1.64@3395.63,2620 3395.32,2620.32 3395.32,2705.32 v2(3410,2720) ; U3.33@4315.08,2605 4315.08,2529.92 v1(4317.54,2527.46)
  Bottom Layer w6: v2(3410,2720) 3420.6,2730.6 3526,2728 3903.9,2728 4064.27,2730.08 4174.92,2730.08 4210,2695 4210,2555 4237.54,2527.46 v1(4317.54,2527.46)
FMC_A9: U1.65 U3.34 | length 1267
  Top Layer w6: U1.65@3415.32,2620 3415.16,2620.16 3415.16,2679.84 3415.16,2681.91 3415.16,2685.16 v2(3420,2690) ; v2(4344.18,2504) 4345.39,2505.2 4345.39,2603.81 U3.34@4346.57,2605
  Bottom Layer w6: v2@3422,2687 3448.24,2713.24 4151.76,2713.24 4190,2675 4190,2550 4236,2504 v2(4344.18,2504)
FMC_A10: U1.66 U3.22 | length 1345.7
  Top Layer w6: v1(3425,2845) 3425,2840 3438,2827 3438,2623 U1.66@3435,2620 ; v1(4274.56,3000) 4289.12,3000 4315.08,3025.95 U3.22@4315.08,3077.44
  Signal w6: v1(3841,3017.37) 3841.13,3017.5 3884.3,3017.5 3886.8,3020 3927,3020 3962,2985 4259.56,2985 v1(4274.56,3000)
  Bottom Layer w6: v1(3425,2845) 3422.5,2847.5 3422.5,2947.5 3420,2950 3470,3000 3821,3000 3838.37,3017.37 v1(3841,3017.37)
FMC_A11: U1.67 U3.35 | length 1796.9
  Top Layer w6: v1(3350,2675) 3350,2726.63 3417.5,2794.13 3417.5,2822.75 3407.5,2832.75 3407.5,2852.25 3417.75,2862.5 3432.25,2862.5 3452,2842.75 3452,2744.16 3454.84,2741.32 3454.84,2620.16 U1.67@3454.69,2620 ; v1(4375.37,2484.63) 4375,2485 4375,2598.07 4378.07,2601.14 U3.35@4378.07,2605
  Bottom Layer w6: v1(3350,2675) 3353,2672 3452,2672 3475,2695 4125,2695 4175,2645 4175,2540 4230,2485 4375,2485 v1(4375.37,2484.63)
FMC_A12: U1.106 U3.36 | length 1285.3
  Top Layer w6: v1(3890,3075) 3890,3060.97 3915,3035.97 U1.106@3949.39,3035.97 ; v1(4265,2740) 4295,2740 4369,2666 4393.57,2666 4409.57,2650 U3.36@4409.57,2605
  some w6: v1(3890,3075) 3887.5,3077.5 3822.75,3077.5 3812.5,3067.25 3812.5,3047.37 3825,3034.87 3945.13,3034.87 3995,2985 4065,2985 4075.01,2974.99 4075.01,2970.01 4075,2945 4035,2905 4035,2900 4005,2870 3975,2870 3945,2840 3945,2820 4025,2740 4075,2740 v1(4265,2740)
FMC_A16_CLE: J2.23 U1.99 U4.16 | length 1977.9
  Top Layer w6: v1(3650,3295) 3650,3110 3861.83,2898.17 U1.99@3949.39,2898.17 ; v1(4126,3403) 4132.5,3396.5 4132.5,3372.75 4138.99,3366.26 U4.16@4182.6,3366.26
  some w6: v1(3650,3295) 3658.54,3295 3736.54,3373 3877.37,3373 ; v1(3905,3590) 3854.54,3590 3842,3577.46 3842,3550.37 3919.5,3472.87 3919.5,3402.25 ; v1(4126,3403) 3920.25,3403 3919.5,3402.25 ; 3877.37,3373 3890.25,3373 3909.25,3392 ; 3877.37,3373 3896.37,3392 3909.25,3392 ; 3909.25,3392 3919.5,3402.25
  Bottom Layer w6: v1(3905,3590) 4009.54,3590 4022.54,3603 4037.46,3603 4070.81,3569.64 4070.81,3564.44 4080.25,3555 4189.71,3555 4227.74,3516.97 J2.23@4345,3516.97
FMC_A17_CLE: J2.21 U1.100 U4.17 | length 1633.4
  Top Layer w6: U1.100@3949.39,2917.85 4000.61,2917.85 4002.75,2920 v2(4080,2920) ; v2(4110,3115) 4110,3139.12 4105,3144.12 4105,3165 4115,3175 4250,3175 4265,3190 4265,3225 4284.88,3244.88 v2(4284.88,3322.99) 4283.57,3324.29 4283.57,3338 4275,3346.57 ; U4.17@4182.6,3346.57 4275,3346.57 ; v1(4240,3627) 4252.5,3639.5 4297.22,3639.5 4355,3581.72 4355,3391.57 4310,3346.57 4291.51,3346.57 4275,3346.57
  Signal w6: v2(4100,3070) 4100,3073.25 4110,3083.25 v2(4110,3115)
  Bottom Layer w6: v2(4080,2920) 4080,3050 v2(4100,3070) ; v1(4240,3627) 4240,3553 4260,3533 4380,3533 4397,3533 4405,3525 4405,3470 4388.98,3453.98 4362.5,3453.98 4362.5,3450 4348.98,3450 J2.21@4345,3453.98
FMC_BA0: U1.108 U3.20 | length 563
  Top Layer w6: U1.108@3949.39,3075.34 4010,3075.34 4140.34,2945 4289.14,2945 4373.21,3029.07 4373.21,3072.58 U3.20@4378.07,3077.44
FMC_BA1: U1.109 U3.21 | length 520.3
  Top Layer w6: U1.109@3949.39,3095.02 4019.98,3095.02 4145,2970 4285,2970 4346.57,3031.57 U3.21@4346.57,3077.44
FMC_D0: J2.45 J2.48 U1.104 U3.2 U3.7 U4.29 U4.32 | length 2408.7
  Top Layer w6: v1(3906,3001.68) 3911.09,2996.59 U1.104@3949.39,2996.59 ; v1(4789.52,3124.29) 4788.52,3123.29 4788.52,3078.44 U3.7@4787.52,3077.44 4787.52,3033.48 4799.93,3021.07 4884.07,3021.07 4884.07,3015.93 v2(4885,3015) ; U3.2@4945,3077.44 4945,3135 4925,3155 v2(4925,3165) 4925,3187 4914.2,3197.8 4914.2,3279.2 4922.52,3287.52 U4.29@4970,3287.52
  Top Layer w10: U4.32@4970,3346.57 5033.43,3346.57
  Top Layer w15: U4.29@4970,3287.52 5032.52,3287.52 5045,3300 5045,3335 5033.43,3346.57
  Signal w6: v1(3906,3001.68) 3934.68,2973 4353.25,2973 4510,3129.75 4510,3160 4515,3165 4560,3165 4615,3110 4768.37,3110 4783.6,3125.24 4788.57,3125.24 v1(4789.52,3124.29) ; v2(4885,3015) 4925,3055 v2(4925,3165)
  Bottom Layer w6: J2.45@4530.04,3296.5 4489.5,3296.5 4487.58,3294.58 4487.58,3207.17 4492.74,3202.01 J2.48@4530.04,3202.01 4570.01,3202.01 4588,3220 4735.05,3220 4787.52,3167.53 4787.52,3126.29 v1(4789.52,3124.29)
FMC_D1: J2.46 U1.105 U3.4 U4.30 | length 2862.2
  Top Layer w6: v1(3880,3000) 3880,3000.43 3901.57,3022 3914.28,3022 3920,3016.28 U1.105@3949.39,3016.28
  Top Layer w10: U3.4@4882.01,3077.44 v1(4882.01,3171.16) 4882.01,3267.01 4922.13,3307.13 4969.92,3307.13 U4.30@4970,3307.2
  Signal w6: v1(3880,3000) 3879.87,2999.87 3670.13,2999.87 3647.5,2977.25 3647.5,2962.75 3667.75,2942.5 3975.07,2942.5 3992.57,2925 4059.54,2925 4073.54,2939 4729,2939 4882.01,3092.01 v1(4882.01,3171.16)
  Bottom Layer w6: J2.46@4530.04,3265 4558,3265 4568,3255 4660,3255 4684,3279 4684,3442 4720,3478 4902,3478 4915,3465 4915,3262 v1(4882,3229)
FMC_D2: J2.47 U1.142 U3.5 U4.31 | length 2343.1
  Top Layer w6: U1.142@3690.91,3629.09 3690.45,3628.64 3690.45,3570.45 3690,3570 3690,3566.75 3695,3561.75 3695,3356 v2(3720,3331)
  Top Layer w15: v2(4841.09,3279.43) 4846.6,3279.43 4850.51,3275.51 ; 4850,3225 U3.5@4850.51,3077.44 4850.51,3275.51 ; U4.31@4970,3326.89 4901.89,3326.89 4850.51,3275.51
  Signal w6: v2(3720,3331) 3721,3330 3760.25,3330 3777.75,3347.5 3805.13,3347.5 3823.63,3329 4067.46,3329 4079.44,3340.99 4389.01,3340.99 4452,3278 4498,3278 4585,3278 4594,3269 4750.54,3269 4752.54,3267 4767.46,3267 4779.88,3279.43 v2(4841.09,3279.43)
  Bottom Layer w6: J2.47@4502.48,3233.5 J2.47@4530.04,3233.5 4788.5,3233.5 4834.43,3279.43 v2(4841.09,3279.43)
FMC_D4: J2.49 U1.68 U3.8 U4.41 | length 2776.6
  Top Layer w6: v2(3470,2782) 3470.86,2782 3474.37,2778.49 U1.68@3474.37,2620 ; v1(4754.44,3142.37) 4756.02,3140.79 U3.8@4756.02,3077.44 ; v1@4756.02,3142 4756.02,3160.65 4800,3204.62 4800,3449.74 4874,3523.74 U4.41@4970,3523.74
  Signal w6: v2(3470,2782) 3470,3120 3590.5,3240.5 4015.47,3240.5 4025.97,3230 4081.47,3230 4097.25,3245.78 4124.47,3273 4287.54,3273 4292.54,3278 4389.17,3278 4436.09,3231.09 4518.91,3231.09 4584.78,3165.22 4675.22,3165.22 4731.6,3165.22 v1(4754.44,3142.37)
  Bottom Layer w6: J2.49@4499.74,3170.26 4530.04,3170.26 J2.49@4530.3,3170.26 ; J2.49@4530.04,3170.51 J2.49@4530.3,3170.26 ; v1(4754.44,3142.37) 4754.44,3143.58 4730.09,3167.93 4561.58,3167.93 4559.26,3170.26 J2.49@4530.3,3170.26
FMC_D5: J2.50 U1.69 U3.10 U4.42 | length 2725
  Top Layer w6: U1.69@3494.06,2620 3494.06,2843.8 3502.5,2852.25 v1(3502.5,2865.59) ; v2(4540,3140.43) 4580.5,3180.93 4580.5,3300.5 v1(4630,3350) ; v2(4690,2985) 4692.3,2987.3 4692.3,2996.3 4693.03,2997.03 U3.10@4693.03,3077.44 ; U4.42@4970,3543.42 5010,3543.42 5026,3527.42 v1(5026,3486)
  Signal w6: v1(3502.5,2865.59) 3502.5,3087.47 3600.03,3185 4055,3185 4080,3210 4246.75,3210 4249.25,3212.5 4419.25,3212.5 4426.75,3205 v1(4465,3205) ; v2(4540,3140.43) 4595.43,3085 4617.71,3085 4690,3012.71 v2(4690,2985) ; v1(4630,3350) 4766,3486 v1(5026,3486)
  Bottom Layer w6: v1(4465,3205) 4465,3195 4479.79,3180.21 4479.79,3165.21 4499.58,3145.42 4499.58,3141.92 4502.48,3139.02 J2.50@4530.04,3139.02
FMC_D6: J2.51 U1.70 U3.11 U4.43 | length 2634.3
  Top Layer w6: U1.70@3513.74,2620 3513.74,2793.74 3540,2820 v1(3540,2855) ; v1(4620,3000) 4620,3002 4649,3031 4661.54,3038 U3.11@4661.54,3077.44 4661.54,3156.54 4680,3175 4680,3310 4788,3418 4788,3454.71 4896.4,3563.11 U4.43@4970,3563.11
  Signal w6: v1(3540,2855) 3540,3090 3622.59,3172.59 4222.67,3172.59 4222.75,3172.5 4397.5,3172.5 4407.5,3162.5 v2(4435,3162.5)
  some w6: v2(4435,3162.5) 4407.3,3162.5 4395.77,3150.98 4395.77,3136.48 4532.25,3000 v1(4620,3000)
  Bottom Layer w6: v2(4435,3162.5) 4435,3160 4477.48,3117.52 4477.48,3107.52 4492.48,3107.52 ; 4490.86,3109.14 4492.48,3107.52 ; J2.51@4530.04,3107.52 4492.48,3107.52
FMC_D7: J2.52 U1.73 U3.13 U4.44 | length 2333.2
  Top Layer w6: U1.73@3572.8,2620 3572.8,2824.55 3580,2831.75 v2(3580,2835) ; v1(4595,3060) 4598.54,3060 U3.13@4598.54,3077.44 4598.54,3201.96 v1(4598,3202.5) ; v1@4598.54,3202.5 4598.54,3258.79 4639,3299.25 4639,3322.68 4899.11,3582.79 U4.44@4970,3582.79
  Signal w6: v2(3580,2835) 3580,3070 3643,3133 4245.56,3133 4251.06,3127.5 4397.04,3127.5 v1(4413.27,3143.73)
  some w6: v1(4413.27,3143.73) 4476.92,3143.73 4535.69,3202.5 v1(4598,3202.5)
  Bottom Layer w6: J2.52@4530.04,3076.02 4576.27,3076.02 4592.29,3060 v1(4595,3060) ; v1@4591.5,3056.5 4598,3050
FMC_D8: J2.53 U1.74 U3.42 | length 1892.1
  Top Layer w6: U1.74@3592.48,2620 3592.48,2483.58 3657.76,2418.3 3710.25,2418.3 3726.04,2402.5 4087.5,2402.5 v2(4115,2375) ; v2(4595,2540) 4596.77,2541.77 4596.77,2603.23 U3.42@4598.54,2605 4598.54,2660 4598.54,2773.54 v1(4629,2804)
  some w6: v2(4115,2375) 4153.22,2375 4188.22,2410 4465,2410 v2(4595,2540)
  Bottom Layer w6: J2.53@4530.04,3044.53 4574,3044.53 4582.5,3036.03 4582.5,3010 4589.5,3003 4589.5,3000.5 4635,2955 4663,2955 4675,2943 4675,2850 v1(4629,2804)
FMC_D9: J2.54 U1.75 U3.44 | length 2081.1
  Top Layer w6: U1.75@3612.17,2620 3612.17,2480.86 3662.73,2430.3 3715.22,2430.3 3725.52,2420 4077.52,2420 4085.02,2427.5 v1(4440,2427.5) ; 4660.77,2664.23 4660.77,2605.77 U3.44@4661.54,2605 v1(4661.54,2722.54)
  Signal w6: v1(4580.79,2904.29) 4677.5,2807.58 4677.5,2738.5 v1(4661.54,2722.54)
  Bottom Layer w6: v1(4440,2427.5) 4441.75,2427.5 4484.05,2469.8 4489.8,2469.8 4530,2510 4530,2585 4635,2690 4635,2696 v1(4661.54,2722.54) ; J2.54@4530.04,3013.03 4523.4,3006.39 4488.36,3006.39 4482.25,3012.5 4467.75,3012.5 4457.5,3002.25 4457.5,2987.75 4467.75,2977.5 4477.25,2977.5 4487.58,2967.17 4487.58,2908.91 4492.85,2903.64 4580.14,2903.64 v1(4580.79,2904.29)
FMC_D10: J2.55 U1.76 U3.45 | length 2170.9
  Top Layer w6: U1.76@3631.85,2620 3631.85,2496.18 3678.84,2449.19 4438.69,2449.19 v1(4440,2450.5) ; U3.45@4693.03,2605 U3.45@4695,2606.97 ; v1(4695,2699) U3.45@4695,2606.97 ; v1(4720,2740) 4720,2660.44 4707.65,2648.1 4707.65,2619.62 U3.45@4695,2606.97
  Signal w6: v1(4609.49,2831.51) 4609.49,2749.83 4654.29,2705.04 4668.78,2705.04 4703.75,2740 v1(4720,2740)
  Bottom Layer w6: v1(4440,2450.5) 4440,2458.51 4495,2513.51 4495,2720 4523.24,2748.24 4525,2750 4529.97,2750 4668.78,2740.04 4679.04,2729.78 4695,2701 v1(4695,2699) ; J2.55@4530.04,2981.54 4557.6,2981.54 4576.64,2962.5 4603.5,2962.5 4624.5,2941.5 4624.5,2846.52 v1(4609.49,2831.51)
FMC_D11: J2.56 U1.77 U3.47 | length 2075.5
  Top Layer w6: U1.77@3651.54,2620 3651.54,2493.46 3683.81,2461.19 4386.19,2461.19 v1(4405,2480) ; v1(4755,2760) v1(4755,2675) ; v1(4755,2675) 4755,2562.63 4755.51,2562.63 4755.51,2604.49 U3.47@4756.02,2605 4755,2606.02 v1(4755,2675)
  Bottom Layer w6: v1(4405,2480) 4415.1,2480.35 4424.75,2490 4435,2490 4470,2525 4470,2535 4470,2740 4509.5,2779.5 4610.5,2779.5 ; J2.56@4530.04,2950.04 4571.96,2950.04 4576,2946 4603.03,2946 4608.99,2940.04 cw(c4604.74,2935.8) 4610.74,2936.13 ; 4610.74,2936.12 4612.5,2903.47 4612.5,2884.65 4608.11,2880.26 ccw(c4612.35,2876.01) 4606.73,2878.12 4592,2838.76 4592,2832.03 4591.99,2831.96 4591.99,2824.26 4606.99,2783.02 4610.5,2779.5 ; v1(4755,2675) v1@4755,2680.25 ; v1(4755,2760) 4679.14,2760 ccw(c4632.06,2712.92) 4632.06,2779.5 4610.5,2779.5
FMC_D12: J2.57 U1.78 U3.48 | length 2396.2
  Top Layer w6: U1.78@3671.22,2620 3671.22,2652.7 3672.22,2652.7 3675,2655.48 v1(3675,2540) ; v1(4780,2535) 4788.76,2543.76 4788.76,2603.76 U3.48@4787.52,2605 v1(4787.52,2657)
  Signal w6: v1(3675,2540) 3808,2407 4537.46,2407 4540.46,2410 4655,2410 v1(4780,2535) ; v1(4391,2756.68) 4391,2680 4416.5,2654.5 4785.02,2654.5 v1(4787.52,2657)
  Bottom Layer w6: v1(4391,2756.68) 4398.42,2764.1 4450,2764.1 4465,2779.1 4465,2825 4477,2837 4490.89,2837 4492.85,2838.96 4567.23,2838.96 4576.49,2838.96 4580,2842.48 4580,2860.24 4590.25,2870.49 4590.25,2879.37 4600.5,2889.62 4600.5,2898.5 4595,2931 4577.46,2931 4565,2918.54 J2.57@4530.04,2918.54
FMC_D13: J2.58 U1.96 U3.50 | length 1383.4
  Top Layer w6: v1(3901,2841) 3902.89,2839.11 U1.96@3949.39,2839.11 ; U3.50@4850.51,2605 v1(4850.51,2710)
  Signal w6: v1(3901,2841) 3969,2841 4004.42,2805.58 4240.33,2805.58 4277.5,2842.75 4277.5,2862.25 4272.5,2867.25 4272.5,2887.25 4282.75,2897.5 4333.5,2897.5 4353,2878 v1(4471,2878) 4471,2829.25 4620.25,2680 4718,2680 4748,2710 v1(4850.51,2710)
  Bottom Layer w6: v1(4471,2878) 4480.05,2887.05 J2.58@4530.04,2887.05
FMC_D14: J2.59 U1.97 U3.51 | length 1450.5
  Top Layer w6: U1.97@3949.39,2858.8 3953.59,2863 4031.28,2863 4047.78,2879.5 4139.5,2879.5 4221,2798 v1(4437,2798) ; v1(4874,2659.99) 4882.01,2651.98 U3.51@4882.01,2605
  Signal w6: v1(4437,2798) 4407.57,2798 4373.5,2763.93 4373.5,2731.5 4376,2729 4376,2635 4391,2620 4834.01,2620 v1(4874,2659.99)
  Bottom Layer w6: v1(4437,2798) 4437,2827 4465.55,2855.55 J2.59@4530.04,2855.55
FMC_D15: J2.60 U1.98 U1.143 U3.53 | length 4016
  Top Layer w6: U1.143@3671.22,3629.09 3671.22,3601.61 3669.22,3599.61 3669.05,3599.61 3665.54,3596.1 3665.54,3390 ; v1(3725,3270) 3725,3300.54 3665.54,3360.01 3665.54,3390 ; U1.98@3949.39,2878.48 3871.52,2878.48 3841.52,2878.48 3830,2890 3830,2905 3632.5,3102.5 3632.5,3356.96 3665.54,3390 ; U3.53@4945,2605 v1(4945,2669)
  Signal w6: v1(3725,3270) 3735.25,3270 3749.16,3256.09 4006.09,3256.09 4037,3287 4192,3287 4193.5,3285.5 4283.07,3285.5 4287.57,3290 4396.97,3290 4443.88,3243.09 4617.96,3243.09 4618.04,3243 4822.15,3243 4825.65,3246.5 4934.5,3246.5 4945,3236 v1(4945,2669) 4877,2601 4340,2601 4317,2624 v1(4317,2682)
  Bottom Layer w6: v1(4317,2682) 4382,2682 4448.36,2748.36 4453.36,2748.36 4499.53,2794.53 4499.53,2824.06 J2.60@4530.04,2824.06
FMC_NBL0: J2.43 U1.169 U3.15 | length 1899.6
  Top Layer w6: U1.169@3159.41,3629.09 3159.41,3559.41 3288.82,3430 v1(3420,3430) ; v1(4475,3350) 4415,3290 4415,3260 4440,3235 4475,3235 4500,3210 4500,3145 4522,3123 4522,3122.49 4535.55,3108.94 U3.15@4535.55,3077.44
  Signal w6: v1(3420,3430) 3423,3427 4042.54,3427 4049.54,3420 4064.46,3420 4064.96,3420.5 4401.79,3420.5 4472.29,3350 v1(4475,3350)
  Bottom Layer w6: v1(4475,3350) 4477.71,3350 4487.19,3359.49 J2.43@4530.04,3359.49 J2.43@4529.78,3359.74
FMC_NBL1: J2.44 U1.170 U3.39 | length 4045.5
  Top Layer w6: U1.170@3139.73,3629.09 3139.73,3559.41 3319.14,3380 v1(3420,3380) ; U3.39@4504.05,2605 4504.05,2530 4463.05,2488.99 4463.05,2418.3 4447.75,2403 4371.5,2403 4356,2387.5 4356,2325 4375,2306 v1(4903,2306)
  Signal w6: v1(3420,3380) 3702.37,3380 3717.37,3365 4145,3365 4180,3400 4390,3400 4421.75,3368.25 4421.75,3365 4456.75,3330 v1(4560,3330) ; v1(4583,3330) 4650,3330 4687,3367 v1(4892,3367)
  some w6: v1(4892,3367) 4903,3356 v1(4903,2306)
  Bottom Layer w6: v1(4560,3330) 4566.5,3330 4566.5,3330.9 4532.95,3330.9 J2.44@4530.04,3327.99 4580.99,3327.99 v1(4583,3330)
FMC_NCE3: R17.2 U1.152 U4.9 | length 922.7
  Top Layer w6: v1(3494.06,3560.94) U1.152@3494.06,3629.09 ; v1(4092.19,3572.5) 4110.1,3554.59 4110.1,3549.9 v1(4125,3535) 4125,3516 4136,3505 4181.65,3505 U4.9@4182.6,3504.05
  Signal w6: v1(3494.06,3560.94) 3530,3525 3855,3525 3860,3530 4002.63,3530 4044.82,3572.19 4091.88,3572.19 v1(4092.19,3572.5)
  Bottom Layer w6: R17.2@4050,3500.63 4079.63,3500.63 4114,3535 v1(4125,3535)
FMC_NOE: J2.26 U1.146 U4.8 | length 1023.6
  Top Layer w6: U1.146@3612.17,3629.09 3611.08,3630.18 3611.08,3691.08 v1(3635,3715) ; U4.8@4182.6,3523.74 4258.74,3523.74 4285,3550 v1(4285,3610)
  Bottom Layer w6: v1(3635,3715) 3695,3715 3715,3695 4200,3695 v1(4285,3610) 4343.54,3610 J2.26@4345,3611.46